# EAGLE board 3365c1e53a7ea87593df0e5cd2596002 (EAGLE 7.1.0)
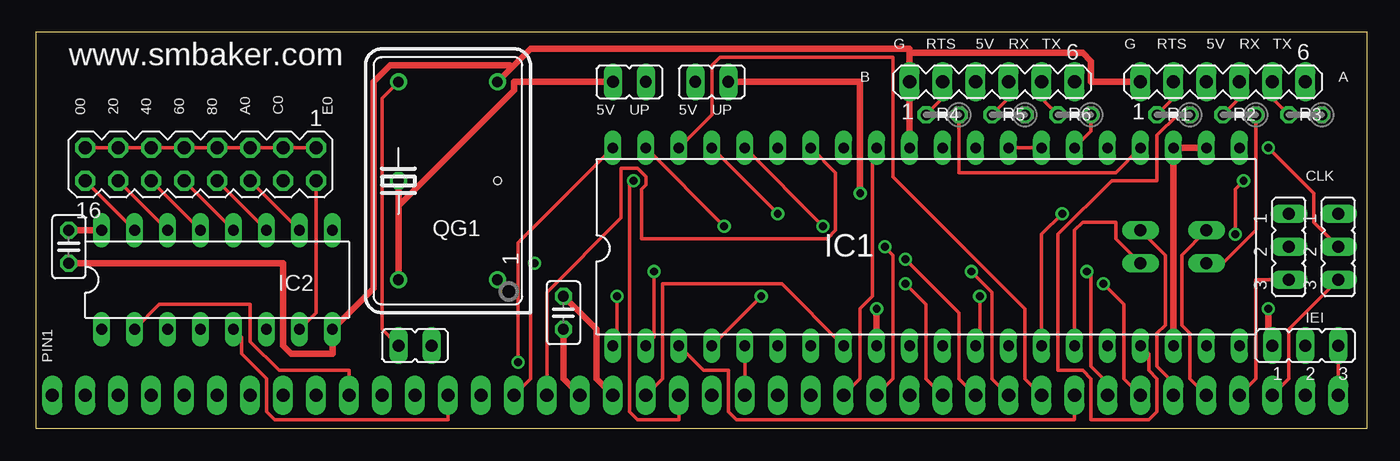
[diagram p0: board, top side]
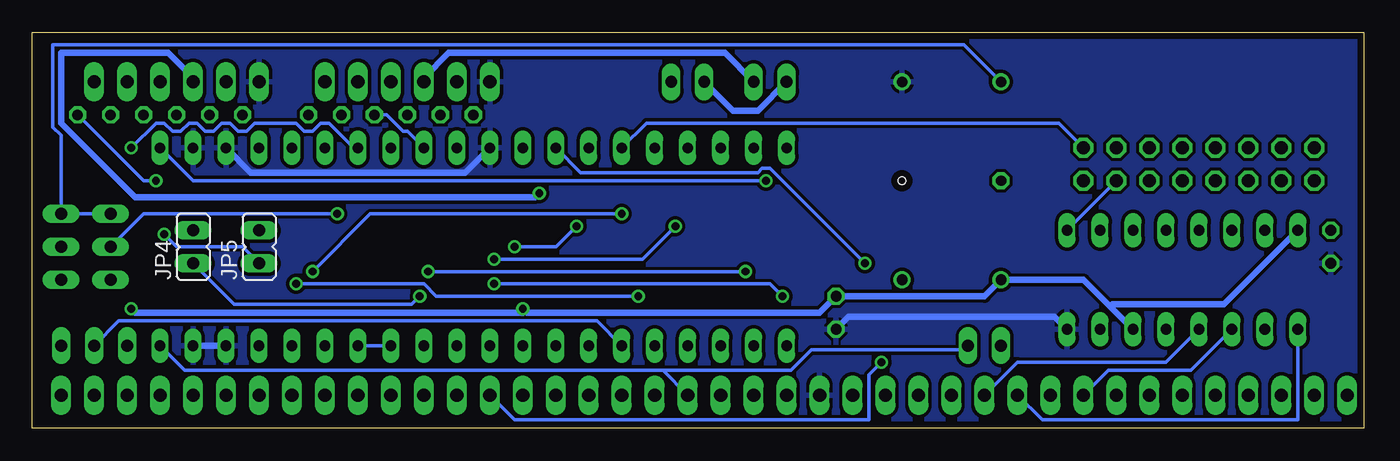
[diagram p1: board, bottom side, seen from below]

Size 102.54 x 30.47 mm. Coordinates in mm from the lower left corner, seen from the top.
Outline: 0,0 102.54,0 102.54,30.47 0,30.47 0,0
Copper layers (1*16): Top 0.035mm / dielectric 1.5mm / Bottom 0.035mm
Design rules "default *": minimum track width 10mil, minimum drill 24mil, track to track 10mil, track to pad 10mil, pad to pad 10mil, via to via 10mil, smd to smd 8mil, copper to edge 20mil, drill to drill 8mil, minimum pad ring 10mil, minimum via ring 8mil, stop-mask expansion 4mil, vias tented up to drill 25mil, thermal gap 10mil
Net classes: 1 PWR: width 0.508 mm
Holes 0.6 mm at 35.56,19.05

## Footprints (pad centres in the part's own frame; a part is rotated, then mirrored left to right if it is on the bottom)
C025-025X050 = drill 0.813 octagon: 1 -1.27,0; 2 1.27,0
DIL40 = drill 0.813 long: 1 -24.13,-7.62; 2 -21.59,-7.62; 3 -19.05,-7.62; 4 -16.51,-7.62; 5 -13.97,-7.62; 6 -11.43,-7.62; 7 -8.89,-7.62; 8 -6.35,-7.62; 9 -3.81,-7.62; 10 -1.27,-7.62; 11 1.27,-7.62; 12 3.81,-7.62; 13 6.35,-7.62; 14 8.89,-7.62; 15 11.43,-7.62; 16 13.97,-7.62; 17 16.51,-7.62; 18 19.05,-7.62; 19 21.59,-7.62; 20 24.13,-7.62; 21 24.13,7.62; 22 21.59,7.62; 23 19.05,7.62; 24 16.51,7.62; 25 13.97,7.62; 26 11.43,7.62; 27 8.89,7.62; 28 6.35,7.62; 29 3.81,7.62; 30 1.27,7.62; 31 -1.27,7.62; 32 -3.81,7.62; 33 -6.35,7.62; 34 -8.89,7.62; 35 -11.43,7.62; 36 -13.97,7.62; 37 -16.51,7.62; 38 -19.05,7.62; 39 -21.59,7.62; 40 -24.13,7.62
DIL16 = drill 0.813 long: 1 -8.89,-3.81; 2 -6.35,-3.81; 3 -3.81,-3.81; 4 -1.27,-3.81; 5 1.27,-3.81; 6 3.81,-3.81; 7 6.35,-3.81; 8 8.89,-3.81; 9 8.89,3.81; 10 6.35,3.81; 11 3.81,3.81; 12 1.27,3.81; 13 -1.27,3.81; 14 -3.81,3.81; 15 -6.35,3.81; 16 -8.89,3.81
JP1 = drill 0.914 long: 1 0,-1.27; 2 0,1.27
JP2 = drill 0.914 long: 1 -2.54,0; 2 0,0; 3 2.54,0
DIL14S = drill 0.813: 1 -7.62,-3.81; 7 7.62,-3.81; 8 7.62,3.81; 14 -7.62,3.81
0204V = drill 0.813 octagon: 1 -1.27,0; 2 1.27,0
MA08-2 = drill 1.016 octagon: 1 -8.89,-1.27; 2 -8.89,1.27; 3 -6.35,-1.27; 4 -6.35,1.27; 5 -3.81,-1.27; 6 -3.81,1.27; 7 -1.27,-1.27; 8 -1.27,1.27; 9 1.27,-1.27; 10 1.27,1.27; 11 3.81,-1.27; 12 3.81,1.27; 13 6.35,-1.27; 14 6.35,1.27; 15 8.89,-1.27; 16 8.89,1.27
MA06-1 = drill 1.016 long: 1 -6.35,0; 2 -3.81,0; 3 -1.27,0; 4 1.27,0; 5 3.81,0; 6 6.35,0
SIP40 = drill 1.016 long: 1 -48.26,0; 2 -45.72,0; 3 -43.18,0; 4 -40.64,0; 5 -38.1,0; 6 -35.56,0; 7 -33.02,0; 8 -30.48,0; 9 -27.94,0; 10 -25.4,0; 11 -22.86,0; 12 -20.32,0; 13 -17.78,0; 14 -15.24,0; 15 -12.7,0; 16 -10.16,0; 17 -7.62,0; 18 -5.08,0; 19 -2.54,0; 20 0,0; 21 2.54,0; 22 5.08,0; 23 7.62,0; 24 10.16,0; 25 12.7,0; 26 15.24,0; 27 17.78,0; 28 20.32,0; 29 22.86,0; 30 25.4,0; 31 27.94,0; 32 30.48,0; 33 33.02,0; 34 35.56,0; 35 38.1,0; 36 40.64,0; 37 43.18,0; 38 45.72,0; 39 48.26,0; 40 50.8,0
SMALL_TP = drill 0.8 octagon: TP 0,0

## Placement (x,y rotation side)
C1  [C025-025X050]  2.54,13.97 270 top
C8  [C025-025X050]  40.64,8.89 270 top
IC1  [DIL40]  68.58,13.97 0 top
IC2  74HCT138N  [DIL16]  13.97,11.43 0 top
JP1  [JP1]  29.21,6.35 270 top
JP2  [JP1]  52.07,26.67 90 top
JP3  [JP1]  45.72,26.67 90 top
JP4  [JP1]  90.17,13.97 0 bottom
JP5  [JP1]  85.09,13.97 0 bottom
JP6  [JP2]  96.52,13.97 270 top
JP7  [JP2]  100.33,13.97 270 top
JP8  [JP2]  97.79,6.35 0 top
QG1  [DIL14S]  31.75,19.05 90 top
R1  [0204V]  87.63,24.13 180 top
R2  [0204V]  92.71,24.13 180 top
R3  [0204V]  97.79,24.13 180 top
R4  [0204V]  69.85,24.13 180 top
R5  [0204V]  74.93,24.13 180 top
R6  [0204V]  80.01,24.13 180 top
SV1  [MA08-2]  12.7,20.32 180 top
SV2  [MA06-1]  91.44,26.67 0 top
SV4  [MA06-1]  73.66,26.67 0 top
U$1  RC2014  [SIP40]  49.53,2.54 0 top
U$2  SMALL_TP  [SMALL_TP]  27.94,19.05 0 top

## Library data of the parts
C1 C8 R1-R6 = resistor
IC1 U$1 U$2 = scott
IC2 = 74xx-eu
JP1-JP8 = jumper
QG1 = crystal; OC_FARNELL: unknown; OC_NEWARK: unknown
SV1 SV2 SV4 = con-lstb; OC_FARNELL: unknown; OC_NEWARK: unknown

## Nets
+5V [PWR]: C1.1 C8.1 IC1.9 IC2.6 IC2.16 JP2.2 JP3.2 JP8.1 QG1.14 U$1.18 U$2.TP
A0: IC1.34 U$1.16
A1: IC1.33 U$1.15
A3: IC2.5 U$1.13
A4: IC2.4 U$1.12
A5: IC2.1 U$1.11
A6: IC2.2 U$1.10
A7: IC2.3 U$1.9
CLK: IC1.20 JP1.2 U$1.21
CLKA: IC1.13 IC1.14 JP6.2
D0: IC1.40 U$1.27
D1: IC1.1 U$1.28
D2: IC1.39 U$1.29
D3: IC1.2 U$1.30
D4: IC1.38 U$1.31
D5: IC1.3 U$1.32
D6: IC1.37 U$1.33
D7: IC1.4 U$1.34
E0: JP6.3 U$1.37
E1: JP7.3 U$1.38
GND [PWR]: C1.2 C8.2 IC1.18 IC1.19 IC1.22 IC1.23 IC1.31 IC2.8 QG1.7 SV2.1 SV4.1 U$1.17
N$1: IC1.8 U$1.19
N$2: IC1.36 U$1.26
N$3: JP4.2 U$1.36
N$4: R4.2 SV4.2
N$5: IC1.35 SV1.1 SV1.3 SV1.5 SV1.7 SV1.9 SV1.11 SV1.13 SV1.15
N$6: IC1.6 JP8.2
N$7: IC2.15 SV1.16
N$8: IC2.14 SV1.14
N$9: IC2.13 SV1.12
N$10: IC2.12 SV1.10
N$11: IC2.11 SV1.8
N$12: IC2.10 SV1.6
N$13: IC2.9 SV1.4
N$14: IC2.7 SV1.2
N$15: R1.2 SV2.2
N$16: R2.2 SV2.4
N$17: R3.2 SV2.5
N$18: IC1.27 IC1.28 JP7.2
N$19: JP8.3 U$1.40
N$22 [PWR]: JP2.1 SV2.3
N$24: R5.2 SV4.4
N$25: R6.2 SV4.5
N$26 [PWR]: JP3.1 SV4.3
N$36: IC1.21 U$1.20
N$37: IC1.5 U$1.22
RCTX: JP5.2 U$1.35
RD: IC1.32 U$1.25
RTS: IC1.17 R1.1
RTS2: IC1.24 R4.1
RX: IC1.12 JP4.1 R2.1
RX2: IC1.29 R5.1
SCLK: JP1.1 JP6.1 JP7.1 QG1.8
TX: IC1.15 JP5.1 R3.1
TX2: IC1.26 R6.1

## Tracks (layer width: path | path; a pad name or v marks a point on that pad's centre or on a via)
+5V  (via drill 0.61)
  Top 0.508: C8.1 43.18,7.62 43.18,3.81 U$1.18 | v64.77,9.21 IC1.9 | JP8.1 94.93,6.67 v94.93,9.21 | IC2.16 C1.1 | QG1.14 27.94,17.14 | 27.94,17.14 U$2.TP | JP3.2 36.83,26.67 36.83,26.04 27.94,17.14
  Bottom 0.508: v94.93,9.21 94.61,8.89 64.77,8.89 v64.77,9.21 64.45,8.89 41.91,8.89 C8.1 29.21,10.16 QG1.14 21.59,11.43 19.53,9.37 | JP3.2 46.67,24.45 48.58,24.45 JP2.2 | 19.53,9.37 IC2.6 | IC2.16 10.79,9.53 19.37,9.53 19.53,9.37
A0
  Top 0.254: IC1.34 61.59,19.68 61.59,15.24 60.96,14.61 46.67,14.61 46.67,18.41 46.99,18.73 46.99,19.37 46.35,20 45.09,20 45.09,16.19 39.37,10.48 U$1.16
A1  (via drill 0.61)
  Top 0.254: v38.42,12.7 38.1,12.38 38.1,3.81 U$1.15
  Bottom 0.254: IC1.33 60.33,19.68 46.67,19.68 46.35,20 45.72,20 v38.42,12.7
A3
  Top 0.254: IC2.5 15.88,6.99 15.88,5.71 17.78,3.81 17.78,1.27 18.41,0.64 31.75,0.64 U$1.13
A4
  Bottom 0.254: IC2.4 15.24,5.08 26.67,5.08 U$1.12
A5
  Bottom 0.254: IC2.1 5.08,0.64 24.77,0.64 U$1.11
A6
  Top 0.254: IC2.2 9.53,9.53 16.51,9.53 16.51,6.67 18.73,4.45 24.13,4.45 U$1.10
A7
  Bottom 0.254: IC2.3 13.34,4.45 19.68,4.45 U$1.9
CLK
  Bottom 0.254: IC1.20 90.81,4.45 53.98,4.45 | U$1.21 53.98,4.45 | JP1.2 30.8,6.03 42.55,6.03 44.13,4.45 53.98,4.45
CLKA  (via drill 0.61)
  Top 0.254: v79.06,16.51 77.47,14.92 IC1.14
  Bottom 0.254: IC1.14 IC1.13 | JP6.2 93.98,16.51 v79.06,16.51
D0  (via drill 0.61)
  Top 0.254: IC1.40 37.15,14.29 v37.15,5.08
  Bottom 0.254: v37.15,5.08 38.1,4.13 38.1,0.64 65.41,0.64 U$1.27
D1  (via drill 0.61)
  Top 0.254: IC1.1 44.77,6.67 v44.77,10.16 | v66.99,11.11 68.58,9.53 68.58,3.81 U$1.28
  Bottom 0.254: v44.77,10.16 45.72,11.11 v66.99,11.11
D2  (via drill 0.61)
  Top 0.254: v53.02,15.56 IC1.39 | v66.99,13.02 71.12,8.89 71.12,3.81 U$1.29
  Bottom 0.254: v53.02,15.56 55.56,13.02 v66.99,13.02
D3  (via drill 0.61)
  Top 0.254: IC1.2 47.62,6.99 v47.62,12.06 | v72.07,12.06 73.66,10.48 73.66,3.81 U$1.30
  Bottom 0.254: v72.07,12.06 v47.62,12.06
D4
  Top 0.254: IC1.38 52.07,24.13 52.07,27.94 52.7,28.57 66.04,28.57 66.04,19.37 76.2,9.21 76.2,3.81 U$1.31
D5
  Top 0.254: IC1.3 51.44,4.45 53.34,4.45 53.34,1.27 53.98,0.64 80.01,0.64 U$1.32
D6  (via drill 0.61)
  Top 0.254: v57.15,16.51 IC1.37 | v80.96,12.06 81.28,11.75 81.28,4.76 82.55,3.49 U$1.33
  Bottom 0.254: v57.15,16.51 76.52,16.51 v80.96,12.06
D7  (via drill 0.61)
  Top 0.254: v55.88,10.16 IC1.4 | v82.23,11.11 83.82,9.53 83.82,3.81 U$1.34
  Bottom 0.254: v55.88,10.16 71.44,10.16 72.39,11.11 v82.23,11.11
E0
  Top 0.254: JP6.3 93.98,11.43 93.98,3.81 U$1.37
E1
  Top 0.254: JP7.3 96.52,7.62 96.52,3.81 U$1.38
GND
  Top 0.508: C1.2 19.05,12.7 19.05,6.35 19.68,5.71 22.86,5.71 IC2.8 26.04,10.79 26.04,26.67 27.3,27.94 36.51,27.94 36.67,27.78 | U$1.17 40.64,3.81 C8.2 | IC1.22 IC1.23 IC1.18 | IC1.31 SV4.1 67.31,28.89 | 36.67,27.78 38.1,29.21 67.31,29.21 67.31,28.89 | 36.67,27.78 QG1.7 | SV2.1 81.28,26.67 81.28,28.26 80.64,28.89 67.31,28.89
  Bottom 0.508: IC2.8 23.81,8.57 39.69,8.57 C8.2 | IC1.19 IC1.18 | IC1.23 85.72,19.68 69.22,19.68 IC1.31
  pour Bottom: 0,0 0,30.48 102.87,30.48 102.87,0
N$1
  Top 0.254: IC1.8 57.47,11.11 48.26,11.11 48.26,3.81 U$1.19
N$2  (via drill 0.61)
  Top 0.254: v60.64,15.56 IC1.36 | v65.41,13.97 66.04,13.34 66.04,3.81 U$1.26
  Bottom 0.254: v60.64,15.56 62.23,13.97 v65.41,13.97
N$3
  Top 0.254: JP4.2 88.27,13.34 88.27,7.94 88.9,7.3 88.9,3.81 U$1.36
N$4
  Top 0.254: R4.2 69.85,25.4 SV4.2
N$5
  Top 0.254: SV1.15 SV1.13 SV1.11 SV1.9 SV1.7 SV1.5 SV1.3 SV1.1
  Bottom 0.254: IC1.35 55.24,23.5 23.5,23.5 SV1.1
N$6
  Bottom 0.254: IC1.6 59.05,8.26 95.89,8.26 JP8.2
N$7
  Top 0.254: SV1.16 IC2.15
N$8
  Top 0.254: SV1.14 IC2.14
N$9
  Top 0.254: SV1.12 IC2.13
N$10
  Top 0.254: SV1.10 IC2.12
N$11
  Top 0.254: SV1.8 IC2.11
N$12
  Top 0.254: SV1.6 IC2.10
N$13
  Bottom 0.254: SV1.4 IC2.9
N$14
  Top 0.254: IC2.7 21.59,8.89 SV1.2
N$15
  Top 0.254: R1.2 87.63,25.4 SV2.2
N$16
  Top 0.254: R2.2 92.71,25.4 SV2.4
N$17
  Top 0.254: R3.2 95.25,25.4 SV2.5
N$18  (via drill 0.61)
  Top 0.254: IC1.27 IC1.28 | JP7.2 98.42,15.88 98.42,18.1 v94.93,21.59
  Bottom 0.254: v94.93,21.59 93.03,23.5 92.39,23.5 91.76,22.86 91.12,22.86 90.49,23.5 89.85,23.5 89.22,22.86 88.58,22.86 87.95,23.5 87.31,23.5 86.68,22.86 86.04,22.86 85.41,23.5 82.23,23.5 81.6,22.86 80.96,22.86 80.33,23.5 79.69,23.5 77.79,21.59 IC1.27
N$19
  Top 0.254: U$1.40 JP8.3
N$22  (via drill 0.61)
  Top 0.508: JP2.1 63.5,26.67 v63.5,18.1
  Bottom 0.508: v63.5,18.1 63.82,17.78 94.61,17.78 100.33,23.5 100.33,28.89 92.08,28.89 90.17,26.99 SV2.3
N$24
  Top 0.254: R5.2 74.93,25.4 SV4.4
N$25
  Top 0.254: R6.2 77.47,25.4 SV4.5
N$26
  Bottom 0.508: JP3.1 49.21,28.89 70.48,28.89 72.39,26.99 SV4.3
N$36  (via drill 0.61)
  Top 0.254: v46.04,19.05 45.72,18.73 45.72,1.27 46.35,0.64 49.53,0.64 U$1.20
  Bottom 0.254: IC1.21 90.17,19.05 v46.04,19.05
N$37
  Top 0.254: U$1.22 IC1.5
RCTX
  Top 0.254: JP5.2 87,13.34 87,7.94 86.36,7.3 86.36,4.76 87.63,3.49 U$1.35
RD
  Top 0.254: IC1.32 64.45,21.27 64.45,10.16 63.5,9.21 63.5,3.81 U$1.25
RTS
  Top 0.254: IC1.17 85.72,5.71 85.72,4.45 86.36,3.81 86.36,1.27 85.72,0.64 81.28,0.64 81.28,3.81 80.64,4.45 78.74,4.45 78.74,14.92 82.87,19.05 86.36,19.05 86.36,22.54 87.95,24.13 R1.1
RTS2
  Top 0.254: IC1.24 83.19,19.68 71.12,19.68 R4.1
RX  (via drill 0.61)
  Top 0.254: IC1.12 72.71,6.67 v72.71,10.16 | R2.1 93.98,15.24 91.44,12.7 JP4.1
  Bottom 0.254: v72.71,10.16 73.34,9.53 87,9.53 JP4.1
RX2
  Bottom 0.254: IC1.29 73.66,22.86 73.98,22.86 75.25,24.13 R5.1
SCLK
  Top 0.254: QG1.8 26.67,25.4 26.67,7.62 JP1.1
  Bottom 0.254: JP6.1 JP7.1 100.33,22.54 100.97,23.18 100.97,29.53 30.8,29.53 QG1.8
TX  (via drill 0.61)
  Top 0.254: IC1.15 80.01,15.24 80.64,15.88 83.19,15.88 83.19,14.61 JP5.1 | v93.03,19.05 92.39,18.41 v92.39,14.92
  Bottom 0.254: R3.1 93.98,19.05 v93.03,19.05 | v92.39,14.92 91.44,13.97 86.36,13.97 JP5.1
TX2
  Top 0.254: IC1.26 81.28,22.86 R6.1

## Text on the board
tPlace: G | RTS | 5V | RX | TX | G | RTS | 5V | RX | TX | www.smbaker.com | B | A | 00 | 20 | 40 | 60 | 80 | A0 | C0 | E0 | 5V | UP | 5V | UP | CLK | IEI | PIN1